# Altium PCB PLL_PCB.PcbDoc (part 2 of 3)
Units mil, origin at the board's own origin, x right, y up, seen from the top; angles counter-clockwise.
Board outline 5844 x 4441 mil, 4 copper layers (Top Layer, GND Layer, Power Layer, Bottom Layer), stack 22.156 mil thick; 143 components, 61 nets, 427 pads, 2616 vias.
Unrouted connection lines stored in the file: 5.
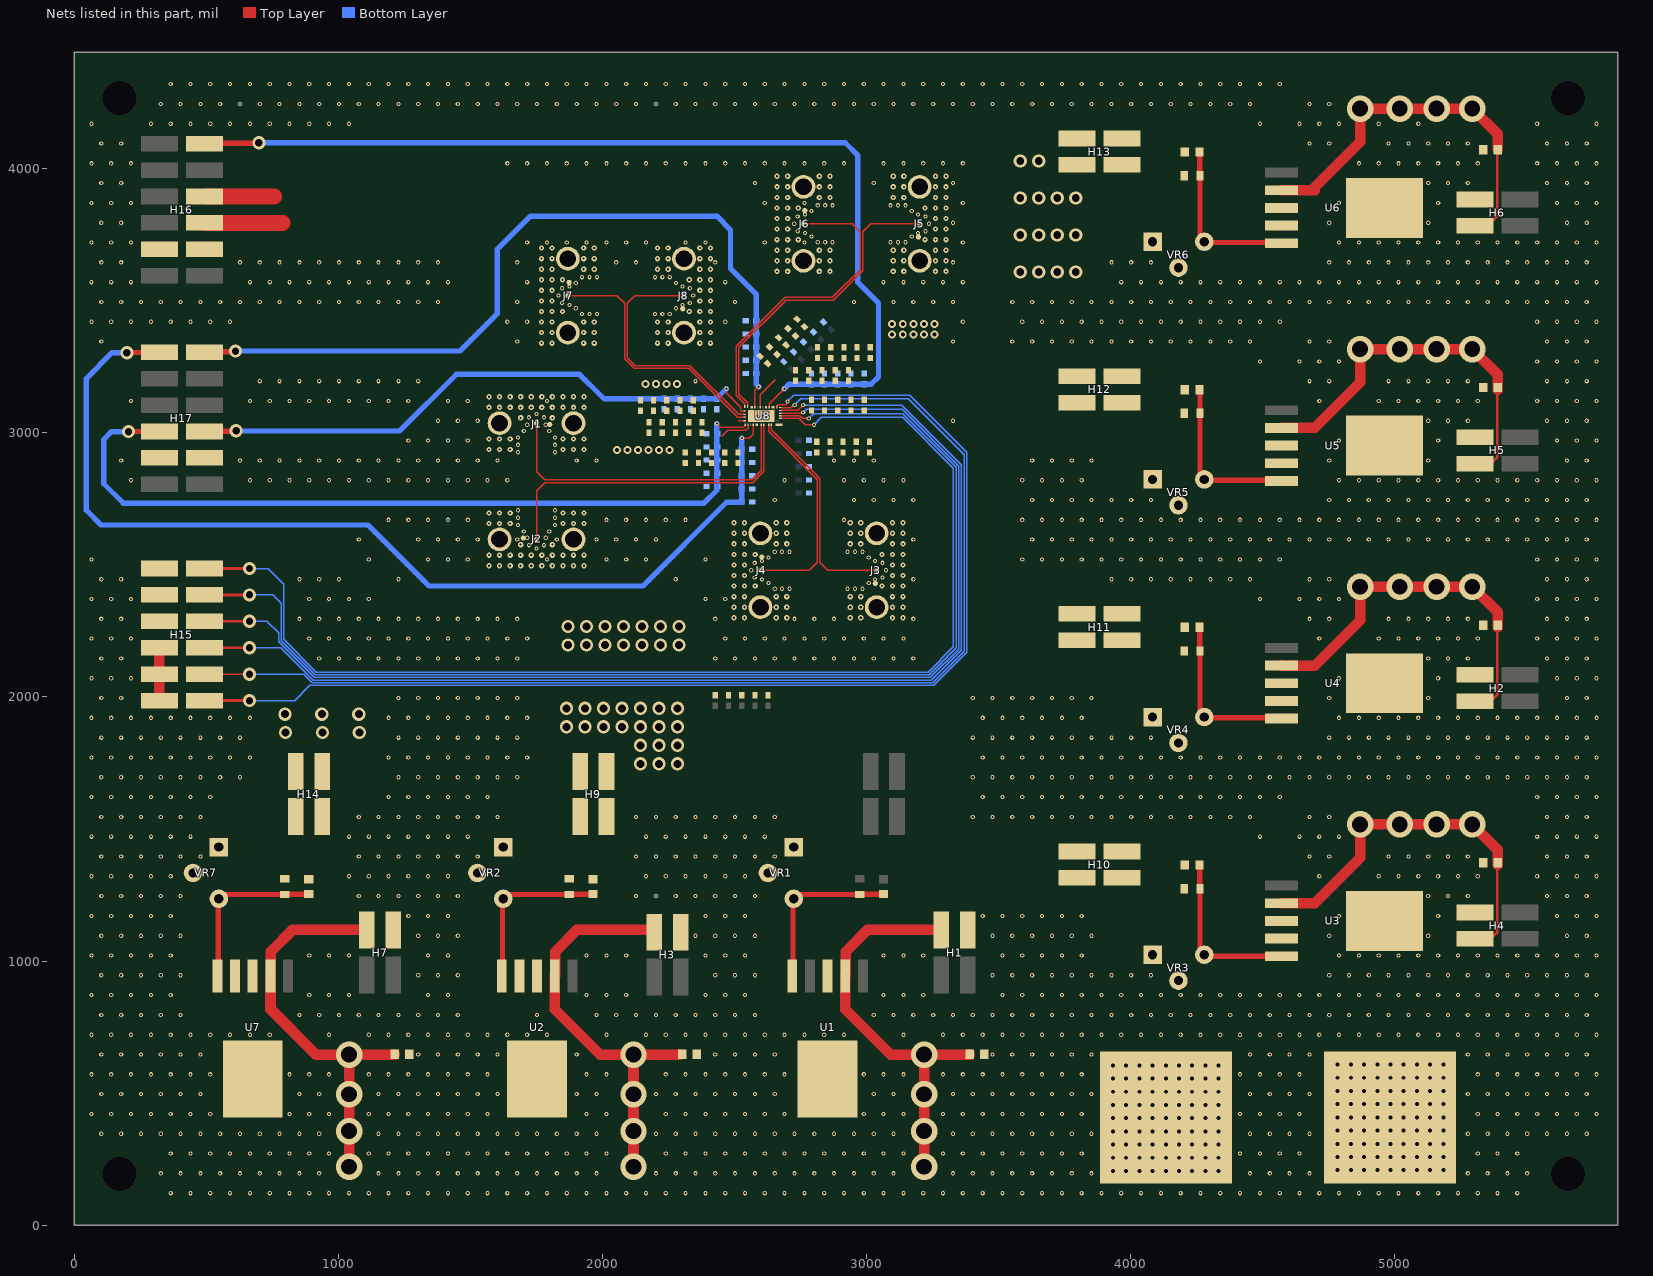
[diagram p4: the nets of this part, all layers, seen from the top]

## Via types
v1: diameter 16, hole 8, Top Layer to Bottom Layer, tented both sides, 2037 vias
v2: diameter 20, hole 8, Top Layer to Bottom Layer, tented both sides, 272 vias
v3: diameter 30, hole 15, Top Layer to Bottom Layer, tented both sides, 182 vias
v4: diameter 50, hole 30, Top Layer to Bottom Layer, tented both sides, 84 vias
v5: diameter 100, hole 60, Top Layer to Bottom Layer, tented both sides, 28 vias
v6: diameter 50, hole 28, Top Layer to Bottom Layer, tented both sides, 13 vias

## Nets (pads, with @x,y where several pads share a name; then routed paths per layer and width w, separated by ;. In a path a pad name is that pad's centre, name@x,y a point inside that pad or via, vN(x,y) a via of type N, cw(c..) or ccw(c..) an arc to the next point about the centre after c; other vN are vias at no path point) (continued)
GND: C1.1 C2.1 C3.1 C4.1 C5.1 C6.1 C7.1 C15.1 C16.1 C17.1 C18.1 C19.1 C20.1 C21.1 C22.1 C23.1 C24.1 C25.1 C26.1 C27.1 C28.1 C29.1 C30.1 C31.1 C32.1 C33.1 C34.1 C35.1 C36.1 C37.1 C38.1 C39.1 C40.1 C41.1 C42.1 C43.1 C44.1 C45.1 C46.1 C47.1 C48.1 C49.1 C50.1 C51.1 C52.1 C53.1 C54.1 C55.1 C56.1 C57.1 C58.1 C59.1 C60.1 C61.1 C62.1 C63.1 C64.1 C65.1 C66.1 C67.1 C68.1 C69.1 C70.1 C71.1 C72.1 C73.1 C74.1 C75.1 C76.1 C77.1 C78.1 C79.1 C80.1 C81.1 C82.1 C83.1 C84.1 C85.1 C86.1 C87.1 C88.1 C89.1 C90.1 C91.1 C92.1 C93.1 C94.1 H1.1 H2.1 H3.1 H4.1 H5.1 H6.1 H7.1 H15.1 H15.2 H15.3 H16.5 H16.11 H17.5 H17.11 J1.1 J1.2 J1.4 J2.1 J2.2 J2.4 J3.1 J3.2 J3.4 J4.1 J4.2 J4.4 J5.1 J5.2 J5.4 J6.1 J6.2 J6.4 J7.1 J7.2 J7.4 J8.1 J8.2 J8.4 P2.1 U1.3 U1.6 U2.3 U2.6 U3.3 U3.6 U4.3 U4.6 U5.3 U5.6 U6.3 U6.6 U7.3 U7.6 U8.1 VR1.2 VR2.2 VR3.2 VR4.2 VR5.2 VR6.2 VR7.2 | length 27.4
  Top Layer w20: U8.1@2584.51,3072 2592.47,3064.04 U8.1@2598.18,3064.04 ; U8.1@2601.01,3064.04 2606.36,3069.38 U8.1@2606.36,3072.21
  other v1: 364.5,121 439.5,121 514.5,121 589.5,121 664.5,121 739.5,121 814.5,121 889.5,121 964.5,121 1039.5,121 1114.5,121 1189.5,121 1264.5,121 1339.5,121 1414.5,121 1489.5,121 1564.5,121 1639.5,121 1714.5,121 1789.5,121 1864.5,121 1939.5,121 2014.5,121 2089.5,121 2164.5,121 2239.5,121 2314.5,121 2389.5,121 2464.5,121 2539.5,121 2614.5,121 2689.5,121 2764.5,121 2839.5,121 2914.5,121 2989.5,121 3064.5,121 3139.5,121 3214.5,121 3289.5,121 3364.5,121 3439.5,121 3514.5,121 3589.5,121 3664.5,121 3739.5,121 3814.5,121 3889.5,121 3964.5,121 4039.5,121 4114.5,121 4189.5,121 4264.5,121 4339.5,121 4414.5,121 4489.5,121 4564.5,121 4639.5,121 4714.5,121 4789.5,121 4864.5,121 4939.5,121 5014.5,121 5089.5,121 5164.5,121 5239.5,121 5314.5,121 5389.5,121 5464.5,121 327,196 402,196 477,196 552,196 627,196 702,196 777,196 852,196 927,196 1152,196 1227,196 1302,196 1377,196 1452,196 1527,196 1602,196 1677,196 1752,196 1827,196 1902,196 1977,196 2202,196 2277,196 2352,196 2427,196 2502,196 2577,196 2652,196 2727,196 2802,196 2877,196 2952,196 3027,196 3102,196 3327,196 3402,196 3477,196 3552,196 3627,196 3702,196 3777,196 3852,196 4452,196 4527,196 4602,196 4677,196 5277,196 5352,196 5427,196 5502,196 364.5,271 439.5,271 514.5,271 589.5,271 664.5,271 739.5,271 814.5,271 889.5,271 964.5,271 1114.5,271 1189.5,271 1264.5,271 1339.5,271 1414.5,271 1489.5,271 1564.5,271 1639.5,271 1714.5,271 1789.5,271 1864.5,271 1939.5,271 2014.5,271 2239.5,271 2314.5,271 2389.5,271 2464.5,271 2539.5,271 2614.5,271 2689.5,271 2764.5,271 2839.5,271 2914.5,271 2989.5,271 3064.5,271 3139.5,271 3289.5,271 3364.5,271 3439.5,271 3514.5,271 3589.5,271 3664.5,271 3739.5,271 3814.5,271 4414.5,271 4489.5,271 4564.5,271 4639.5,271 5314.5,271 5389.5,271 5464.5,271 102,346 177,346 252,346 327,346 402,346 477,346 552,346 627,346 702,346 777,346 852,346 927,346 1152,346 1227,346 1302,346 1377,346 1452,346 1527,346 1602,346 1677,346 1752,346 1827,346 1902,346 1977,346 2202,346 2277,346 2352,346 2427,346 2502,346 2577,346 2652,346 2727,346 2802,346 2877,346 2952,346 3027,346 3102,346 3327,346 3402,346 3477,346 3552,346 3627,346 3702,346 3777,346 3852,346 4452,346 4527,346 4602,346 4677,346 5277,346 5352,346 5427,346 5502,346 5577,346 5652,346 5727,346 64.5,421 139.5,421 214.5,421 289.5,421 364.5,421 439.5,421 514.5,421 814.5,421 889.5,421 964.5,421 1114.5,421 1189.5,421 1264.5,421 1339.5,421 1414.5,421 1489.5,421 1564.5,421 1939.5,421 2014.5,421 2239.5,421 2314.5,421 2389.5,421 2464.5,421 2539.5,421 2614.5,421 2689.5,421 2989.5,421 3064.5,421 3139.5,421 3289.5,421 3364.5,421 3439.5,421 3514.5,421 3589.5,421 3664.5,421 3739.5,421 3814.5,421 4414.5,421 4489.5,421 4564.5,421 4639.5,421 5314.5,421 5389.5,421 5464.5,421 5539.5,421 5614.5,421 5689.5,421 5764.5,421 102,496 177,496 252,496 327,496 402,496 477,496 852,496 927,496 1152,496 1227,496 1302,496 1377,496 1452,496 1527,496 1602,496 1902,496 1977,496 2202,496 2277,496 2352,496 2427,496 2502,496 2577,496 2652,496 3027,496 3102,496 3327,496 3402,496 3477,496 3552,496 3627,496 3702,496 3777,496 3852,496 4452,496 4527,496 4602,496 4677,496 5277,496 5352,496 5427,496 5502,496 5577,496 5652,496 5727,496 64.5,571 139.5,571 214.5,571 289.5,571 364.5,571 439.5,571 514.5,571 814.5,571 889.5,571 964.5,571 1114.5,571 1189.5,571 1264.5,571 1339.5,571 1414.5,571 1489.5,571 1564.5,571 1939.5,571 2014.5,571 2239.5,571 2314.5,571 2389.5,571 2464.5,571 2539.5,571 2614.5,571 2689.5,571 2989.5,571 3064.5,571 3139.5,571 3289.5,571 3364.5,571 3439.5,571 3514.5,571 3589.5,571 3664.5,571 3739.5,571 3814.5,571 4414.5,571 4489.5,571 4564.5,571 4639.5,571 5314.5,571 5389.5,571 5464.5,571 5539.5,571 5614.5,571 5689.5,571 5764.5,571 102,646 177,646 252,646 327,646 402,646 477,646 1302,646 1377,646 1452,646 1527,646 1602,646 1902,646 2427,646 2502,646 2577,646 2652,646 3477,646 3552,646 3627,646 3702,646 3777,646 3852,646 4452,646 4527,646 4602,646 4677,646 5277,646 5352,646 5427,646 5502,646 5577,646 5652,646 5727,646 64.5,721 139.5,721 214.5,721 289.5,721 364.5,721 439.5,721 514.5,721 589.5,721 664.5,721 739.5,721 964.5,721 1114.5,721 1189.5,721 1264.5,721 1339.5,721 1414.5,721 1489.5,721 1564.5,721 1639.5,721 1714.5,721 1789.5,721 2014.5,721 2164.5,721 2239.5,721 2314.5,721 2389.5,721 2464.5,721 2539.5,721 2614.5,721 2689.5,721 2764.5,721 2839.5,721 2914.5,721 3139.5,721 3289.5,721 3364.5,721 3439.5,721 3514.5,721 3589.5,721 3664.5,721 3739.5,721 3814.5,721 3889.5,721 3964.5,721 4039.5,721 4114.5,721 4189.5,721 4264.5,721 4339.5,721 4414.5,721 4489.5,721 4564.5,721 4639.5,721 4714.5,721 4789.5,721 4864.5,721 4939.5,721 5014.5,721 5089.5,721 5164.5,721 5239.5,721 5314.5,721 5389.5,721 5464.5,721 5539.5,721 5614.5,721 5689.5,721 5764.5,721 102,796 177,796 252,796 327,796 402,796 852,796 927,796 1002,796 1077,796 1152,796 1227,796 1302,796 1377,796 1452,796 1752,796 1977,796 2052,796 2127,796 2202,796 2277,796 2352,796 2427,796 2502,796 2577,796 3027,796 3102,796 3177,796 3252,796 3327,796 3402,796 3477,796 3552,796 3627,796 3702,796 3777,796 3852,796 3927,796 4002,796 4077,796 4152,796 4227,796 4302,796 4377,796 4452,796 4527,796 4602,796 4677,796 4752,796 4827,796 4902,796 4977,796 5052,796 5127,796 5202,796 5277,796 5352,796 5427,796 5502,796 5577,796 5652,796 5727,796 64.5,871 139.5,871 214.5,871 289.5,871 364.5,871 889.5,871 964.5,871 1039.5,871 1339.5,871 1414.5,871 1939.5,871 2014.5,871 2089.5,871 2389.5,871 2464.5,871 2539.5,871 3064.5,871 3139.5,871 3214.5,871 3514.5,871 3589.5,871 3664.5,871 3739.5,871 3814.5,871 3889.5,871 3964.5,871 4039.5,871 4114.5,871 4189.5,871 4264.5,871 4339.5,871 4414.5,871 4489.5,871 4564.5,871 4639.5,871 4714.5,871 4789.5,871 4864.5,871 4939.5,871 5014.5,871 5089.5,871 5164.5,871 5239.5,871 5314.5,871 5389.5,871 5464.5,871 5539.5,871 5614.5,871 5689.5,871 5764.5,871 102,946 177,946 252,946 327,946 402,946 1302,946 1377,946 1452,946 2427,946 2502,946 2577,946 3477,946 3552,946 3627,946 3702,946 3777,946 3852,946 3927,946 4002,946 4077,946 4752,946 4827,946 4902,946 4977,946 5052,946 5127,946 5202,946 5277,946 5352,946 5427,946 5502,946 5577,946 5652,946 5727,946 64.5,1021 139.5,1021 214.5,1021 289.5,1021 364.5,1021 889.5,1021 964.5,1021 1039.5,1021 1339.5,1021 1414.5,1021 1939.5,1021 2014.5,1021 2089.5,1021 2389.5,1021 2464.5,1021 2539.5,1021 3064.5,1021 3139.5,1021 3214.5,1021 3514.5,1021 3589.5,1021 3664.5,1021 3739.5,1021 3814.5,1021 4789.5,1021 4864.5,1021 4939.5,1021 5014.5,1021 5089.5,1021 5164.5,1021 5239.5,1021 5314.5,1021 5389.5,1021 5464.5,1021 5539.5,1021 5614.5,1021 5689.5,1021 5764.5,1021 102,1096 177,1096 252,1096 327,1096 402,1096 1302,1096 1377,1096 1452,1096 2352,1096 2427,1096 2502,1096 2577,1096 3477,1096 3552,1096 3627,1096 3702,1096 3777,1096 3852,1096 4752,1096 5127,1096 5652,1096 5727,1096 64.5,1171 139.5,1171 214.5,1171 289.5,1171 364.5,1171 1264.5,1171 1339.5,1171 1414.5,1171 2389.5,1171 2464.5,1171 2539.5,1171 3439.5,1171 3514.5,1171 3589.5,1171 3664.5,1171 3739.5,1171 3814.5,1171 4789.5,1171 5164.5,1171 5614.5,1171 5689.5,1171 5764.5,1171 102,1246 177,1246 252,1246 327,1246 402,1246 1077,1246 1152,1246 1227,1246 1302,1246 1377,1246 1452,1246 2127,1246 2202,1246 2277,1246 2352,1246 2427,1246 2502,1246 2577,1246 5127,1246 5202,1246 5277,1246 5577,1246 5652,1246 5727,1246 64.5,1321 139.5,1321 214.5,1321 289.5,1321 364.5,1321 1039.5,1321 1114.5,1321 1189.5,1321 1264.5,1321 1339.5,1321 1414.5,1321 2164.5,1321 2239.5,1321 2314.5,1321 2389.5,1321 2464.5,1321 2539.5,1321 4714.5,1321 4939.5,1321 5014.5,1321 5089.5,1321 5164.5,1321 5239.5,1321 5314.5,1321 5539.5,1321 5614.5,1321 5689.5,1321 5764.5,1321 102,1396 177,1396 252,1396 327,1396 402,1396 477,1396 1077,1396 1152,1396 1227,1396 1302,1396 1377,1396 1452,1396 1527,1396 2127,1396 2202,1396 2277,1396 2352,1396 2427,1396 2502,1396 2577,1396 2652,1396 4677,1396 4752,1396 4977,1396 5052,1396 5127,1396 5202,1396 5277,1396 5577,1396 5652,1396 5727,1396 64.5,1471 139.5,1471 214.5,1471 289.5,1471 364.5,1471 439.5,1471 1039.5,1471 1114.5,1471 1189.5,1471 1264.5,1471 1339.5,1471 1414.5,1471 1489.5,1471 2164.5,1471 2239.5,1471 2314.5,1471 2389.5,1471 2464.5,1471 2539.5,1471 2614.5,1471 4489.5,1471 4639.5,1471 4714.5,1471 4789.5,1471 5539.5,1471 5614.5,1471 5689.5,1471 5764.5,1471 102,1546 177,1546 252,1546 327,1546 402,1546 477,1546 1077,1546 1152,1546 1227,1546 1302,1546 1377,1546 1452,1546 1527,1546 1602,1546 2127,1546 2202,1546 2277,1546 2352,1546 2427,1546 2502,1546 2577,1546 2652,1546 3402,1546 3477,1546 3552,1546 3627,1546 3702,1546 3777,1546 3852,1546 3927,1546 4002,1546 4077,1546 4152,1546 4227,1546 4302,1546 4377,1546 4452,1546 4677,1546 4752,1546 5577,1546 5652,1546 5727,1546 64.5,1621 139.5,1621 214.5,1621 289.5,1621 364.5,1621 439.5,1621 514.5,1621 1189.5,1621 1264.5,1621 1339.5,1621 1414.5,1621 1489.5,1621 1564.5,1621 3439.5,1621 3514.5,1621 3589.5,1621 3664.5,1621 3739.5,1621 3814.5,1621 3889.5,1621 3964.5,1621 4039.5,1621 4114.5,1621 4189.5,1621 4264.5,1621 4339.5,1621 4414.5,1621 4489.5,1621 4564.5,1621 5539.5,1621 5614.5,1621 5689.5,1621 5764.5,1621 102,1696 177,1696 252,1696 327,1696 402,1696 477,1696 552,1696 627,1696 1227,1696 1302,1696 1377,1696 1452,1696 1527,1696 1602,1696 1677,1696 3402,1696 3477,1696 3552,1696 3627,1696 3702,1696 3777,1696 3852,1696 3927,1696 4002,1696 4077,1696 4152,1696 4227,1696 4302,1696 4377,1696 4452,1696 4527,1696 4602,1696 4677,1696 4752,1696 4827,1696 4902,1696 4977,1696 5052,1696 5127,1696 5202,1696 5277,1696 5352,1696 5427,1696 5502,1696 5577,1696 5652,1696 5727,1696 64.5,1771 139.5,1771 214.5,1771 289.5,1771 364.5,1771 439.5,1771 514.5,1771 589.5,1771 664.5,1771 1189.5,1771 1264.5,1771 1339.5,1771 1414.5,1771 1489.5,1771 1564.5,1771 1639.5,1771 1714.5,1771 3439.5,1771 3514.5,1771 3589.5,1771 3664.5,1771 3739.5,1771 3814.5,1771 3889.5,1771 3964.5,1771 4039.5,1771 4114.5,1771 4189.5,1771 4264.5,1771 4339.5,1771 4414.5,1771 4489.5,1771 4564.5,1771 4639.5,1771 4714.5,1771 4789.5,1771 4864.5,1771 4939.5,1771 5014.5,1771 5089.5,1771 5164.5,1771 5239.5,1771 5314.5,1771 5389.5,1771 5464.5,1771 5539.5,1771 5614.5,1771 5689.5,1771 5764.5,1771 102,1846 177,1846 252,1846 327,1846 402,1846 477,1846 552,1846 627,1846 1227,1846 1302,1846 1377,1846 1452,1846 1527,1846 1602,1846 1677,1846 3402,1846 3477,1846 3552,1846 3627,1846 3702,1846 3777,1846 3852,1846 3927,1846 4002,1846 4077,1846 4752,1846 4827,1846 4902,1846 4977,1846 5052,1846 5127,1846 5202,1846 5277,1846 5352,1846 5427,1846 5502,1846 5577,1846 5652,1846 5727,1846 64.5,1921 139.5,1921 214.5,1921 289.5,1921 364.5,1921 439.5,1921 514.5,1921 589.5,1921 664.5,1921 1189.5,1921 1264.5,1921 1339.5,1921 1414.5,1921 1489.5,1921 1564.5,1921 1639.5,1921 1714.5,1921 3439.5,1921 3514.5,1921 3589.5,1921 3664.5,1921 3739.5,1921 3814.5,1921 4789.5,1921 4864.5,1921 4939.5,1921 5014.5,1921 5089.5,1921 5164.5,1921 5239.5,1921 5314.5,1921 5389.5,1921 5464.5,1921 5539.5,1921 5614.5,1921 5689.5,1921 5764.5,1921 102,1996 177,1996 1227,1996 1302,1996 1377,1996 1452,1996 1527,1996 1602,1996 1677,1996 3402,1996 3477,1996 3552,1996 3627,1996 3702,1996 3777,1996 3852,1996 4752,1996 5127,1996 5652,1996 5727,1996 64.5,2071 139.5,2071 214.5,2071 4789.5,2071 5164.5,2071 5614.5,2071 5689.5,2071 5764.5,2071 102,2146 177,2146 927,2146 1002,2146 1077,2146 1152,2146 1227,2146 1302,2146 1377,2146 1452,2146 1527,2146 1602,2146 1677,2146 2427,2146 2502,2146 2577,2146 2652,2146 2727,2146 2802,2146 2877,2146 2952,2146 3027,2146 3102,2146 3177,2146 5127,2146 5202,2146 5277,2146 5577,2146 5652,2146 5727,2146 64.5,2221 139.5,2221 214.5,2221 889.5,2221 964.5,2221 1039.5,2221 1114.5,2221 1189.5,2221 1264.5,2221 1339.5,2221 1414.5,2221 1489.5,2221 1564.5,2221 1639.5,2221 1714.5,2221 2464.5,2221 2539.5,2221 2614.5,2221 2689.5,2221 2764.5,2221 2839.5,2221 2914.5,2221 2989.5,2221 3064.5,2221 3139.5,2221 4714.5,2221 4939.5,2221 5014.5,2221 5089.5,2221 5164.5,2221 5239.5,2221 5314.5,2221 5539.5,2221 5614.5,2221 5689.5,2221 5764.5,2221 102,2296 177,2296 852,2296 927,2296 1002,2296 1077,2296 1152,2296 1227,2296 1302,2296 1377,2296 1452,2296 1527,2296 1602,2296 1677,2296 2427,2296 2727,2296 2802,2296 2877,2296 3177,2296 4677,2296 4752,2296 4977,2296 5052,2296 5127,2296 5202,2296 5277,2296 5577,2296 5652,2296 5727,2296 64.5,2371 139.5,2371 214.5,2371 889.5,2371 964.5,2371 1039.5,2371 1114.5,2371 2389.5,2371 2464.5,2371 4489.5,2371 4639.5,2371 4714.5,2371 4789.5,2371 5539.5,2371 5614.5,2371 5689.5,2371 5764.5,2371 2652.01,2410 2680.01,2410 2708.01,2410 2928.01,2410 2956.01,2410 2984.01,2410 2628.01,2432 3008.01,2432 2604.01,2445 3032.01,2445 102,2446 177,2446 852,2446 927,2446 1002,2446 1227,2446 2277,2446 3177,2446 3927,2446 4002,2446 4077,2446 4152,2446 4227,2446 4302,2446 4377,2446 4452,2446 4677,2446 4752,2446 5577,2446 5652,2446 5727,2446 2576.01,2452 3060.01,2452 2563.01,2480 3073.01,2480 2576.01,2508 3060.01,2508 2604.01,2515 3032.01,2515 64.5,2521 1114.5,2521 1339.5,2521 1414.5,2521 1489.5,2521 1789.5,2521 2014.5,2521 2089.5,2521 2164.5,2521 2389.5,2521 3589.5,2521 3664.5,2521 3739.5,2521 3814.5,2521 3889.5,2521 3964.5,2521 4039.5,2521 4114.5,2521 4189.5,2521 4264.5,2521 4339.5,2521 4414.5,2521 4489.5,2521 4564.5,2521 5539.5,2521 5614.5,2521 5689.5,2521 5764.5,2521 2628.01,2528 3008.01,2528 2652.01,2550 2680.01,2550 2708.01,2550 2928.01,2550 2956.01,2550 2984.01,2550 1750,2562 1722,2575 1778,2575 1077,2596 1302,2596 1377,2596 1452,2596 1527,2596 1677,2596 1827,2596 1977,2596 2052,2596 2127,2596 2202,2596 3177,2596 3627,2596 3702,2596 3777,2596 3852,2596 3927,2596 4002,2596 4077,2596 4152,2596 4227,2596 4302,2596 4377,2596 4452,2596 4527,2596 4602,2596 4677,2596 4752,2596 4827,2596 4902,2596 4977,2596 5052,2596 5127,2596 5202,2596 5277,2596 5352,2596 5427,2596 5502,2596 5577,2596 5652,2596 5727,2596 1715,2603 1785,2603 1702,2627 1798,2627 1680,2651 1820,2651 1189.5,2671 1264.5,2671 1339.5,2671 1414.5,2671 1489.5,2671 2014.5,2671 2089.5,2671 2164.5,2671 2239.5,2671 2314.5,2671 2914.5,2671 3589.5,2671 3664.5,2671 3739.5,2671 3814.5,2671 3889.5,2671 3964.5,2671 4039.5,2671 4114.5,2671 4189.5,2671 4264.5,2671 4339.5,2671 4414.5,2671 4489.5,2671 4564.5,2671 4639.5,2671 4714.5,2671 4789.5,2671 4864.5,2671 4939.5,2671 5014.5,2671 5089.5,2671 5164.5,2671 5239.5,2671 5314.5,2671 5389.5,2671 5464.5,2671 5539.5,2671 5614.5,2671 5689.5,2671 5764.5,2671 1680,2679 1820,2679 1680,2707 1820,2707 2652,2746 2952,2746 3027,2746 3102,2746 3177,2746 3627,2746 3702,2746 3777,2746 3852,2746 3927,2746 4002,2746 4077,2746 4752,2746 4827,2746 4902,2746 4977,2746 5052,2746 5127,2746 5202,2746 5277,2746 5352,2746 5427,2746 5502,2746 5577,2746 5652,2746 5727,2746 214.5,2821 664.5,2821 739.5,2821 814.5,2821 889.5,2821 964.5,2821 1039.5,2821 1114.5,2821 1189.5,2821 1264.5,2821 1339.5,2821 1414.5,2821 1489.5,2821 1564.5,2821 1639.5,2821 2689.5,2821 2914.5,2821 2989.5,2821 3064.5,2821 3139.5,2821 3589.5,2821 3664.5,2821 3739.5,2821 3814.5,2821 4789.5,2821 4864.5,2821 4939.5,2821 5014.5,2821 5089.5,2821 5164.5,2821 5239.5,2821 5314.5,2821 5389.5,2821 5464.5,2821 5539.5,2821 5614.5,2821 5689.5,2821 5764.5,2821 177,2896 627,2896 702,2896 777,2896 852,2896 927,2896 1002,2896 1077,2896 1152,2896 1227,2896 1302,2896 1377,2896 1452,2896 1527,2896 1602,2896 1902,2896 1977,2896 2877,2896 2952,2896 3027,2896 3627,2896 3702,2896 3777,2896 3852,2896 4752,2896 5127,2896 5652,2896 5727,2896 1680,2927 1820,2927 1680,2955 1820,2955 1264.5,2971 1339.5,2971 1414.5,2971 1489.5,2971 4789.5,2971 5164.5,2971 5614.5,2971 5689.5,2971 5764.5,2971 1680,2983 1820,2983 1702,3007 1798,3007 1715,3031 1785,3031 1377,3046 1452,3046 1527,3046 3327,3046 5127,3046 5202,3046 5277,3046 5577,3046 5652,3046 5727,3046 1722,3059 1778,3059 2584,3065 2604,3065 2624,3065 1750,3072 214.5,3121 664.5,3121 739.5,3121 814.5,3121 889.5,3121 964.5,3121 1039.5,3121 1114.5,3121 1189.5,3121 1264.5,3121 1414.5,3121 1489.5,3121 1789.5,3121 4714.5,3121 4939.5,3121 5014.5,3121 5089.5,3121 5164.5,3121 5239.5,3121 5314.5,3121 5539.5,3121 5614.5,3121 5689.5,3121 5764.5,3121 702,3196 777,3196 852,3196 927,3196 1002,3196 1077,3196 1152,3196 1227,3196 1302,3196 2352,3196 4677,3196 4752,3196 4977,3196 5052,3196 5127,3196 5202,3196 5277,3196 5577,3196 5652,3196 5727,3196 4489.5,3271 4639.5,3271 4714.5,3271 4789.5,3271 5539.5,3271 5614.5,3271 5689.5,3271 5764.5,3271 102,3346 1677,3346 3327,3346 3552,3346 3627,3346 3702,3346 3777,3346 3852,3346 3927,3346 4002,3346 4077,3346 4152,3346 4227,3346 4302,3346 4377,3346 4452,3346 4677,3346 4752,3346 5577,3346 5652,3346 5727,3346 64.5,3421 139.5,3421 214.5,3421 289.5,3421 364.5,3421 439.5,3421 514.5,3421 589.5,3421 1639.5,3421 1714.5,3421 2464.5,3421 3364.5,3421 3589.5,3421 3664.5,3421 3739.5,3421 3814.5,3421 3889.5,3421 3964.5,3421 4039.5,3421 4114.5,3421 4189.5,3421 4264.5,3421 4339.5,3421 4414.5,3421 4489.5,3421 4564.5,3421 5539.5,3421 5614.5,3421 5689.5,3421 5764.5,3421 1922.5,3450 1950.5,3450 1978.5,3450 2198.5,3450 2226.5,3450 2254.5,3450 1898.5,3472 2278.5,3472 1874.5,3485 2302.5,3485 1846.5,3492 2330.5,3492 102,3496 177,3496 252,3496 327,3496 402,3496 477,3496 552,3496 627,3496 702,3496 777,3496 852,3496 927,3496 1002,3496 1077,3496 1152,3496 1227,3496 1302,3496 1377,3496 1677,3496 2502,3496 2952,3496 3102,3496 3177,3496 3252,3496 3327,3496 3552,3496 3627,3496 3702,3496 3777,3496 3852,3496 3927,3496 4002,3496 4077,3496 4152,3496 4227,3496 4302,3496 4377,3496 4452,3496 4527,3496 4602,3496 4677,3496 4752,3496 4827,3496 4902,3496 4977,3496 5052,3496 5127,3496 5202,3496 5277,3496 5352,3496 5427,3496 5502,3496 5577,3496 5652,3496 5727,3496 1833.5,3520 2343.5,3520 1846.5,3548 2330.5,3548 1874.5,3555 2302.5,3555 1898.5,3568 2278.5,3568 64.5,3571 139.5,3571 214.5,3571 664.5,3571 739.5,3571 814.5,3571 889.5,3571 964.5,3571 1039.5,3571 1114.5,3571 1189.5,3571 1264.5,3571 1339.5,3571 1414.5,3571 1714.5,3571 2464.5,3571 3064.5,3571 3139.5,3571 3214.5,3571 3289.5,3571 3364.5,3571 3964.5,3571 4039.5,3571 4114.5,3571 4189.5,3571 4264.5,3571 4339.5,3571 4414.5,3571 4489.5,3571 4564.5,3571 4639.5,3571 4714.5,3571 4789.5,3571 4864.5,3571 4939.5,3571 5014.5,3571 5089.5,3571 5164.5,3571 5239.5,3571 5314.5,3571 5389.5,3571 5464.5,3571 5539.5,3571 5614.5,3571 5689.5,3571 5764.5,3571 1922.5,3590 1950.5,3590 1978.5,3590 2198.5,3590 2226.5,3590 2254.5,3590 102,3646 177,3646 627,3646 702,3646 777,3646 852,3646 927,3646 1002,3646 1077,3646 1152,3646 1227,3646 1302,3646 1377,3646 1677,3646 2052,3646 2127,3646 2427,3646 3327,3646 3927,3646 4002,3646 4077,3646 4752,3646 4827,3646 4902,3646 4977,3646 5052,3646 5127,3646 5202,3646 5277,3646 5352,3646 5427,3646 5502,3646 5577,3646 5652,3646 5727,3646 64.5,3721 139.5,3721 214.5,3721 1714.5,3721 1789.5,3721 1864.5,3721 1939.5,3721 2014.5,3721 2089.5,3721 2164.5,3721 2314.5,3721 2389.5,3721 2614.5,3721 2764.5,3721 3364.5,3721 4789.5,3721 4864.5,3721 4939.5,3721 5014.5,3721 5089.5,3721 5164.5,3721 5239.5,3721 5314.5,3721 5389.5,3721 5464.5,3721 5539.5,3721 5614.5,3721 5689.5,3721 5764.5,3721 2815,3722 2843,3722 2871,3722 3091,3722 3119,3722 3147,3722 2791,3744 3171,3744 2767,3757 3195,3757 2739,3764 3223,3764 2726,3792 3236,3792 102,3796 177,3796 3327,3796 4752,3796 5127,3796 5652,3796 5727,3796 2739,3820 3223,3820 2767,3827 3195,3827 2791,3840 3171,3840 2815,3862 2843,3862 2871,3862 3091,3862 3119,3862 3147,3862 64.5,3871 139.5,3871 214.5,3871 2614.5,3871 2764.5,3871 3364.5,3871 4789.5,3871 5164.5,3871 5614.5,3871 5689.5,3871 5764.5,3871 102,3946 177,3946 2577,3946 3027,3946 3327,3946 5127,3946 5202,3946 5277,3946 5577,3946 5652,3946 5727,3946 64.5,4021 139.5,4021 214.5,4021 1639.5,4021 1714.5,4021 1789.5,4021 1864.5,4021 1939.5,4021 2014.5,4021 2089.5,4021 2164.5,4021 2239.5,4021 2314.5,4021 2389.5,4021 2464.5,4021 2539.5,4021 2614.5,4021 2689.5,4021 2764.5,4021 2839.5,4021 2914.5,4021 3064.5,4021 3139.5,4021 3214.5,4021 3289.5,4021 3364.5,4021 4864.5,4021 4939.5,4021 5014.5,4021 5089.5,4021 5164.5,4021 5239.5,4021 5314.5,4021 5539.5,4021 5614.5,4021 5689.5,4021 5764.5,4021 102,4096 177,4096 4677,4096 4752,4096 4977,4096 5052,4096 5127,4096 5202,4096 5277,4096 5577,4096 5652,4096 5727,4096 64.5,4171 289.5,4171 364.5,4171 439.5,4171 514.5,4171 589.5,4171 664.5,4171 739.5,4171 814.5,4171 889.5,4171 964.5,4171 1039.5,4171 4489.5,4171 4639.5,4171 4714.5,4171 4789.5,4171 4939.5,4171 5089.5,4171 5539.5,4171 5764.5,4171 327,4246 402,4246 477,4246 552,4246 627,4246 702,4246 777,4246 852,4246 927,4246 1002,4246 1077,4246 1152,4246 1227,4246 1302,4246 1377,4246 1452,4246 1527,4246 1602,4246 1677,4246 1752,4246 1827,4246 1902,4246 1977,4246 2052,4246 2127,4246 2202,4246 2277,4246 2352,4246 2427,4246 2502,4246 2577,4246 2652,4246 2727,4246 2802,4246 2877,4246 2952,4246 3027,4246 3102,4246 3177,4246 3252,4246 3327,4246 3402,4246 3477,4246 3552,4246 3627,4246 3702,4246 3777,4246 3852,4246 3927,4246 4002,4246 4077,4246 4152,4246 4227,4246 4302,4246 4377,4246 4452,4246 4677,4246 4752,4246 364.5,4321 439.5,4321 514.5,4321 589.5,4321 664.5,4321 739.5,4321 814.5,4321 889.5,4321 964.5,4321 1039.5,4321 1114.5,4321 1189.5,4321 1264.5,4321 1339.5,4321 1414.5,4321 1489.5,4321 1564.5,4321 1639.5,4321 1714.5,4321 1789.5,4321 1864.5,4321 1939.5,4321 2014.5,4321 2089.5,4321 2164.5,4321 2239.5,4321 2314.5,4321 2389.5,4321 2464.5,4321 2539.5,4321 2614.5,4321 2689.5,4321 2764.5,4321 2839.5,4321 2914.5,4321 2989.5,4321 3064.5,4321 3139.5,4321 3214.5,4321 3289.5,4321 3364.5,4321 3439.5,4321 3514.5,4321 3589.5,4321 3664.5,4321 3739.5,4321 3814.5,4321 3889.5,4321 3964.5,4321 4039.5,4321 4114.5,4321 4189.5,4321 4264.5,4321 4339.5,4321 4414.5,4321 4489.5,4321 4564.5,4321
  other v2: 2498.01,2300 2538.01,2300 2658.01,2300 2698.01,2300 2938.01,2300 2978.01,2300 3098.01,2300 3138.01,2300 2498.01,2340 2538.01,2340 2658.01,2340 2698.01,2340 2938.01,2340 2978.01,2340 3098.01,2340 3138.01,2340 2498.01,2380 2538.01,2380 2658.01,2380 2698.01,2380 2938.01,2380 2978.01,2380 3098.01,2380 3138.01,2380 2498.01,2420 2538.01,2420 2578.01,2420 3058.01,2420 3098.01,2420 3138.01,2420 2498.01,2460 2538.01,2460 3098.01,2460 3138.01,2460 1570,2497 1610,2497 1650,2497 1690,2497 1730,2497 1770,2497 1810,2497 1850,2497 1890,2497 1930,2497 2498.01,2500 2538.01,2500 3098.01,2500 3138.01,2500 1570,2537 1610,2537 1650,2537 1690,2537 1730,2537 1770,2537 1810,2537 1850,2537 1890,2537 1930,2537 2498.01,2540 2538.01,2540 2578.01,2540 3058.01,2540 3098.01,2540 3138.01,2540 1690,2577 1810,2577 2498.01,2580 2538.01,2580 2658.01,2580 2698.01,2580 2938.01,2580 2978.01,2580 3098.01,2580 3138.01,2580 2498.01,2620 2538.01,2620 2658.01,2620 2698.01,2620 2938.01,2620 2978.01,2620 3098.01,2620 3138.01,2620 1570,2657 1610,2657 1650,2657 1850,2657 1890,2657 1930,2657 2498.01,2660 2538.01,2660 2658.01,2660 2698.01,2660 2938.01,2660 2978.01,2660 3098.01,2660 3138.01,2660 1570,2697 1610,2697 1650,2697 1850,2697 1890,2697 1930,2697 1570,2937 1610,2937 1650,2937 1850,2937 1890,2937 1930,2937 1570,2977 1610,2977 1650,2977 1850,2977 1890,2977 1930,2977 1690,3057 1810,3057 1570,3097 1610,3097 1650,3097 1690,3097 1730,3097 1770,3097 1810,3097 1850,3097 1890,3097 1930,3097 1570,3137 1610,3137 1650,3137 1690,3137 1730,3137 1770,3137 1810,3137 1850,3137 1890,3137 1930,3137 1768.5,3340 1808.5,3340 1928.5,3340 1968.5,3340 2208.5,3340 2248.5,3340 2368.5,3340 2408.5,3340 1768.5,3380 1808.5,3380 1928.5,3380 1968.5,3380 2208.5,3380 2248.5,3380 2368.5,3380 2408.5,3380 1768.5,3420 1808.5,3420 1928.5,3420 1968.5,3420 2208.5,3420 2248.5,3420 2368.5,3420 2408.5,3420 1768.5,3460 1808.5,3460 1848.5,3460 2328.5,3460 2368.5,3460 2408.5,3460 1768.5,3500 1808.5,3500 2368.5,3500 2408.5,3500 1768.5,3540 1808.5,3540 2368.5,3540 2408.5,3540 1768.5,3580 1808.5,3580 1848.5,3580 2328.5,3580 2368.5,3580 2408.5,3580 2661,3612 2701,3612 2821,3612 2861,3612 3101,3612 3141,3612 3261,3612 3301,3612 1768.5,3620 1808.5,3620 1928.5,3620 1968.5,3620 2208.5,3620 2248.5,3620 2368.5,3620 2408.5,3620 2661,3652 2701,3652 2821,3652 2861,3652 3101,3652 3141,3652 3261,3652 3301,3652 1768.5,3660 1808.5,3660 1928.5,3660 1968.5,3660 2208.5,3660 2248.5,3660 2368.5,3660 2408.5,3660 2661,3692 2701,3692 2821,3692 2861,3692 3101,3692 3141,3692 3261,3692 3301,3692 1768.5,3700 1808.5,3700 1928.5,3700 1968.5,3700 2208.5,3700 2248.5,3700 2368.5,3700 2408.5,3700 2661,3732 2701,3732 2741,3732 3221,3732 3261,3732 3301,3732 2661,3772 2701,3772 3261,3772 3301,3772 2661,3812 2701,3812 3261,3812 3301,3812 2661,3852 2701,3852 2741,3852 3221,3852 3261,3852 3301,3852 2661,3892 2701,3892 2821,3892 2861,3892 3101,3892 3141,3892 3261,3892 3301,3892 2661,3932 2701,3932 2821,3932 2861,3932 3101,3932 3141,3932 3261,3932 3301,3932 2661,3972 2701,3972 2821,3972 2861,3972 3101,3972 3141,3972 3261,3972 3301,3972
  other v3: 3933,205 3983,205 4033,205 4083,205 4133,205 4183,205 4233,205 4283,205 4333,205 3933,255 3983,255 4033,255 4083,255 4133,255 4183,255 4233,255 4283,255 4333,255 3933,305 3983,305 4033,305 4083,305 4133,305 4183,305 4233,305 4283,305 4333,305 3933,355 3983,355 4033,355 4083,355 4133,355 4183,355 4233,355 4283,355 4333,355 3933,405 3983,405 4033,405 4083,405 4133,405 4183,405 4233,405 4283,405 4333,405 3933,455 3983,455 4033,455 4083,455 4133,455 4183,455 4233,455 4283,455 4333,455 3933,505 3983,505 4033,505 4083,505 4133,505 4183,505 4233,505 4283,505 4333,505 3933,555 3983,555 4033,555 4083,555 4133,555 4183,555 4233,555 4283,555 4333,555 3933,605 3983,605 4033,605 4083,605 4133,605 4183,605 4233,605 4283,605 4333,605
IREF: C53.2 C62.2 C71.2 C80.2 C89.2 H17.1 U8.25 | length 3879.2
  Top Layer w5: v1(2527.7,2980.31) 2556.01,2980.31 2571.01,2995.31 U8.25@2571.01,3031.04
  Top Layer w20: v6(198.72,3304) 199.49,3304.78 321.22,3304.78 H17.1@322,3305.55
  Bottom Layer w20: v6(198.72,3304) 143,3304 45,3206 45,2707 101,2651 1112,2651 1343,2420 2152.54,2420 2470.54,2738 2527.54,2738 2527.7,2738.16 C71.2@2527.7,2838 ; C71.2@2527,2838 2527.54,2838 2527.7,2838.16 2527.7,2887.84 2527.54,2888 C80.2@2527,2888 ; C80.2@2527.7,2888 v1(2527.7,2980.31)
IREF2: C54.2 C63.2 C72.2 C81.2 C90.2 H17.7 U8.5 | length 3104
  Top Layer w5: U8.5@2577.01,3097.04 2577.01,3160.76 v1(2591.29,3175.04)
  Top Layer w20: H17.7@492,3305.55 494.22,3307.78 607.91,3307.78 v6(610.14,3310)
  Bottom Layer w20: v6@599,3310 v6(610.14,3310) 1460,3310 1601,3451 1601,3695 1727,3821 2433,3821 2485,3769 2485,3623 2581.69,3526.31 2581.69,3425 2581.69,3375 2581.69,3325 2581.69,3275 2581.69,3225 2581.69,3184.64 v1(2591.29,3175.04)
LDO_REF: C50.2 C59.2 C68.2 C77.2 C86.2 H16.7 U8.10 | length 3837.1
  Top Layer w5: U8.10@2631.01,3097.04 2631.01,3110.55 2687.77,3167.31 v1(2688.44,3167.31)
  Top Layer w20: H16.7@492,4095.55 493.72,4097.28 696.88,4097.28 v6(698.6,4099)
  Bottom Layer w5: 2705.76,3184.64 2711.89,3184.64
  Bottom Layer w20: v6(698.6,4099) 2919,4099 2967,4051 2967,3570.06 3045,3492.06 3045,3211.99 3017.81,3184.8 2991,3184.8 2990.84,3184.64 2711.89,3184.64 ; v1(2688.44,3167.31) 2705.76,3184.64
LF_VB: C51.2 C60.2 C69.2 C78.2 C87.2 H16.10 U8.27 | length 421.4
  Top Layer w5: 2451.6,2987.71 2474.2,3010.31 2543.01,3010.31 2551.01,3018.31 U8.27@2551.01,3031.04
  Top Layer w60: H16.10@492,3795.55 788.55,3795.55
LF_VB2: C52.2 C61.2 C70.2 C79.2 C88.2 H16.9 U8.7 | length 385.2
  Top Layer w5: U8.7@2597.01,3097.04 2597.01,3144.7 2653.59,3201.27
  Top Layer w60: H16.9@499,3895.55 756.55,3895.55
NC0: VR1.1
NC1: VR2.1
NC2: VR3.1
NC3: VR4.1
NC4: VR5.1
NC6: VR6.1
NC7: VR7.1
NetC8_1: C8.1 R1.1 U1.5 VR1.3 | length 642.3
  Top Layer w20: U1.5@2718.43,943.53 2721.35,946.46 2721.35,1232.82 VR1.3@2724.28,1235.75 2737.81,1235.75 2754.29,1252.22 R1.1@2974.28,1252.22 2975.27,1253.2 3063.3,1253.2 C8.1@3064.28,1254.19
NetC9_1: C9.1 R2.1 U2.5 VR2.3 | length 642.3
  Top Layer w20: U2.5@1618.14,943.53 1621.07,946.46 1621.07,1232.82 VR2.3@1624,1235.75 1637.53,1235.75 1654,1252.22 R2.1@1874,1252.22 1874.98,1253.2 1963.02,1253.2 C9.1@1964,1254.19
NetC10_1: C10.1 R3.1 U3.5 VR3.3 | length 642.3
  Top Layer w20: C10.1@4260.46,1364 4261.45,1363.02 4261.45,1274.98 R3.1@4262.43,1274 4262.43,1054 4278.9,1037.53 VR3.3@4278.9,1024 4284.76,1018.14 U3.5@4571.12,1018.14
NetC11_1: C11.1 R4.1 U4.5 VR4.3 | length 642.3
  Top Layer w20: C11.1@4260.46,2264 4261.45,2263.02 4261.45,2174.98 R4.1@4262.43,2174 4262.43,1954 4278.9,1937.53 VR4.3@4278.9,1924 4281.83,1921.07 4568.2,1921.07 U4.5@4571.12,1918.14
NetC12_1: C12.1 R5.1 U5.5 VR5.3 | length 642.3
  Top Layer w20: C12.1@4260.46,3164 4262.43,3162.03 4262.43,2854 4278.9,2837.53 VR5.3@4278.9,2824 4281.83,2821.07 4568.19,2821.07 U5.5@4571.12,2818.14
NetC13_1: C13.1 R6.1 U6.5 VR6.3 | length 642.3
  Top Layer w20: C13.1@4260.46,4064 4261.45,4063.02 4261.45,3974.98 R6.1@4262.43,3974 4262.43,3754 4278.9,3737.53 VR6.3@4278.9,3724 4281.83,3721.07 4568.19,3721.07 U6.5@4571.12,3718.14
NetC14_1: C14.1 R7.1 U7.5 VR7.3 | length 642.3
  Top Layer w20: U7.5@541.14,943.53 544.63,947.02 544.63,1233.38 VR7.3@547,1235.75 560.53,1235.75 577.03,1252.25 R7.1@789.28,1252.25 ; R7.1@789.31,1252.22 R7.1@797,1252.22 798.01,1253.23 886.05,1253.23 C14.1@887,1254.19
PLL2_CK_N: J8.3 U8.31 | length 967.4
  Top Layer w5: J8.3@2308.5,3520 2122.45,3520 2093.5,3491.05 2093.5,3285.3 2123.48,3255.31 2331.15,3255.31 2516.43,3070.04 U8.31@2539.01,3070.04
PLL2_CK_P: J7.3 U8.30 | length 984
  Top Layer w5: J7.3@1868.5,3520 2054.55,3520 2083.5,3491.05 2083.5,3281.16 2119.34,3245.31 2327.01,3245.31 2512.29,3060.04 U8.30@2539.01,3060.04
PLL_CK_N: J4.3 U8.21 | length 824.3
  Top Layer w5: J4.3@2598.01,2480 2782.44,2480 2813.01,2510.58 2813.01,2563.94 2813.01,2823.17 2788.94,2847.24 2662.94,2973.24 2652.94,2983.24 2629.01,3007.17 U8.21@2629.01,3031.04
PLL_CK_P: J3.3 U8.20 | length 824.3
  Top Layer w5: U8.20@2639.01,3031.04 2639.01,3011.31 2660.01,2990.31 2803.08,2847.24 2823.01,2827.31 2823.01,2559.8 2823.01,2510.58 2853.59,2480 J3.3@3038.01,2480
REF2_CK_N: J6.3 U8.2 | length 1201.1
  Top Layer w5: U8.2@2539.01,3100.66 2539.01,3110.63 2506.68,3142.96 2506.68,3328.16 2691.52,3513 2870.15,3513 2975.49,3618.34 2975.78,3619.06 2976,3619.28 2976,3762 2946,3792 J6.3@2761,3792
REF2_CK_P: J5.3 U8.3 | length 1202.7
  Top Layer w5: U8.3@2549.01,3099.04 2549.01,3114.77 2516.68,3147.1 2516.68,3324.01 2695.67,3503 2874.29,3503 2985.49,3614.2 2985.78,3614.92 2986,3615.14 2986,3762 3016,3792 J5.3@3201,3792
REF_CK_N: J2.3 U8.22 | length 1252.2
  Top Layer w5: J2.3@1750,2597 1750,2781 1781,2812 1814.59,2812 1858.18,2812 2568.88,2812 2611.01,2854.13 U8.22@2611.01,3031.04
REF_CK_P: J1.3 U8.23 | length 1235.6
  Top Layer w5: J1.3@1750,3037 1750,2853 1781,2822 1818.73,2822 1858.18,2822 2564.73,2822 2601.01,2858.28 U8.23@2601.01,3031.04
SCAN_CLKA: H15.7 U8.17 | length 4592.7
  Top Layer w5: U8.17@2676.01,3055.04 2743.36,3055.04 2767.36,3031.04 v1(2800.86,3031.04)
  Top Layer w10: H15.7@492,2486.47 v6(663,2486.47)
  Bottom Layer w5: v6(663,2486.47) 734,2486.47 793,2427.47 793,2218 916.69,2094.31 3233.3,2094.31 3329,2190.01 3329,2866.36 3136.04,3059.31 2829.13,3059.31 v1(2800.86,3031.04)
SCAN_CLKB: H15.8 U8.16 | length 4539.9
  Top Layer w5: U8.16@2676.01,3065.04 2747.5,3065.04 2757.5,3055.04 v1(2781.02,3055.04)
  Top Layer w10: H15.8@492,2386.47 v6(663,2386.47)
  Bottom Layer w5: v6(663,2386.47) 751,2386.47 783,2354.47 783,2213.86 912.55,2084.31 3237.44,2084.31 3339,2185.87 3339,2870.5 3136.18,3073.31 2799.29,3073.31 v1(2781.02,3055.04)
SCAN_IN: H15.10 U8.14 | length 4454
  Top Layer w5: U8.14@2676.01,3085.04 2739.4,3085.04 v1(2759.73,3105.36) v1@2759.73,3102.39
  Top Layer w10: H15.10@492,2186.47 v6(663,2186.47)
  Bottom Layer w5: v6(663,2186.47) 782.1,2186.47 904.26,2064.31 3245.73,2064.31 3359,2177.58 3359,2878.78 3144.47,3093.31 3132.42,3105.36 v1(2759.73,3105.36)
SCAN_OUT: H15.12 U8.12 | length 4552.2
  Top Layer w5: U8.12@2660.51,3098.04 2660.51,3101.64 2665.31,3106.44 2694.7,3106.44 2698.22,3109.96 2698.22,3117.26 v1(2700.32,3119.37)
  Top Layer w10: H15.12@492,1986.47 v6(663,1986.47)
  Bottom Layer w5: v6(663,1986.47) 833.47,1986.47 891.31,2044.31 3254.01,2044.31 3379,2169.3 3379,2926 3162.69,3142.31 2723.27,3142.31 v1(2700.32,3119.37)
SCAN_SEL: H15.11 U8.13 | length 4481.5
  Top Layer w5: H15.11@492,2086.47 v6(663,2086.47) ; U8.13@2673.01,3096.04 2714.96,3096.04 2725.06,3106.14 v1(2728.04,3106.14)
  Bottom Layer w5: v6(663,2086.47) 867.96,2086.47 900.12,2054.31 3249.87,2054.31 3369,2173.44 3369,2918 3157.69,3129.31 2751.22,3129.31 v1(2728.04,3106.14)
SCAN_UPDATE: H15.9 U8.15 | length 4469.1
  Top Layer w5: U8.15@2676.01,3075.04 2754.25,3075.04 2756.75,3077.54 v1(2759.73,3077.54)
  Top Layer w10: H15.9@492,2286.47 v6(663,2286.47)
  Bottom Layer w5: v6(663,2286.47) 729,2286.47 773,2242.47 773,2209.72 908.4,2074.31 3241.59,2074.31 3349,2181.73 3349,2874.64 3140.33,3083.31 3134.61,3089.03 2771.23,3089.03 v1(2759.73,3077.54)
VCO_IREF: C57.2 C66.2 C75.2 C84.2 C93.2 H17.4 U8.28 | length 3148.8
  Top Layer w5: v1(2432.85,3036.04) 2446.58,3022.31 2534.78,3022.31 2541.01,3028.54 U8.28@2541.01,3031.04
  Top Layer w20: v6(204.88,3005) 205.16,3005.28 321.72,3005.28 H17.4@322,3005.55
  Bottom Layer w20: v6@217,3005 v6(204.88,3005) 141,3005 111,2975 111,2807.72 184.72,2734 2384,2734 2432.54,2782.54 2432.54,2796.84 2432.7,2797 C57.2@2433.69,2797 ; v1(2432.85,3036.04) 2432.85,2797.16 C57.2@2433.01,2797
VCO_IREF2: C58.2 C67.2 C76.2 C85.2 C94.2 H17.10 U8.32 | length 2244.5
  Top Layer w5: v1(2469.54,3167.31) 2469.54,3150.64 2522.85,3097.33 2522.85,3085.97 2525.78,3083.04 U8.32@2539.01,3083.04
  Top Layer w20: H17.10@492,3005.55 493.28,3006.83 610.83,3006.83 v6(612.11,3008.11)
  Bottom Layer w20: v6@611,3007 1231,3007 1446,3222 1913,3222 1994.03,3140.97 2005.44,3129.56 2432.58,3129.56 2432.58,3131.21 2468.68,3167.31 v1(2469.54,3167.31)
VDD12_0: H15.4 H15.5 H15.6 | length 200
  Top Layer w40: H15.6@322,1986.47 H15.5@322,2086.47 H15.4@322,2186.47
VDD33: C1.2 C2.2 C3.2 C4.2 C5.2 C6.2 C7.2 H1.3 H2.3 H3.3 H4.3 H5.3 H6.3 H7.3 P1.1 U1.2 U2.2 U3.2 U4.2 U5.2 U6.2 U7.2 | length 10519.8
  Top Layer w10: H2.3@5304,1964.33 5344.47,1964.33 5388,2007.86 5388,2261.21 C4.2@5389.79,2263 ; H4.3@5344.47,1064.33 5388,1107.86 5388,1361.21 C3.2@5389.79,1363 ; H5.3@5344.47,2864.33 5388,2907.86 5388,3161.21 C5.2@5389.79,3163 ; H6.3@5344.47,3775.33 5388,3818.86 5388,4072.21 C6.2@5389.79,4074
  Top Layer w40: v5(1040.31,220.75) 1040.87,221.31 1040.87,355.19 v5(1040.31,355.75) 1040.87,356.31 1040.87,495.19 v5(1040.31,495.75) 1040.87,496.31 1040.87,645.19 v5(1040.31,645.75) ; v5@1040.28,645.78 914.88,645.78 742.49,818.17 742.49,942.97 U7.2@741.93,943.53 743.23,944.83 743.23,1000.07 743.79,1000.63 743.79,1035.71 825.86,1117.78 1098.14,1117.78 1098.61,1117.31 H7.3@1107.67,1117.31 ; v5@1040.34,645.78 1212.91,645.78 C7.2@1213.44,646.31 ; v5(2117.31,220.75) v5(2117.31,355.75) v5(2117.31,495.75) v5(2117.31,645.75) ; H3.3@2183,1117.31 2182.56,1117.75 1902.3,1117.75 1820.23,1035.68 1820.23,944.83 U2.2@1818.93,943.53 1818.93,818.14 1991.33,645.75 v5(2117.31,645.75) ; C2.2@2290.44,646.31 2289.88,645.75 v5(2117.31,645.75) ; v5(3217.6,220.75) v5(3217.6,355.75) v5(3217.6,495.75) v5(3217.6,645.75) ; H1.3@3283.28,1117.31 3282.84,1117.75 3002.58,1117.75 2920.51,1035.68 2920.51,944.83 U1.2@2919.21,943.53 2919.21,818.14 3091.61,645.75 v5(3217.6,645.75) ; C1.2@3390.72,646.31 3390.17,645.75 v5(3217.6,645.75) ; U5.2@4569.82,3020.23 U5.2@4571.12,3018.93 4696.51,3018.93 4868.9,3191.33 v5(4868.9,3317.31) v5(5018.9,3317.31) v5(5158.9,3317.31) v5(5293.9,3317.31) 5391,3220.22 C5.2@5391,3164.21 ; U4.2@4569.83,2120.23 U4.2@4571.12,2118.93 4696.51,2118.93 4868.9,2291.33 v5(4868.9,2417.31) v5(5018.9,2417.31) v5(5158.9,2417.31) v5(5293.9,2417.31) 5391,2320.22 C4.2@5391,2264.21 ; U3.2@4571.12,1218.93 4696.51,1218.93 4868.9,1391.33 v5(4868.9,1517.31) v5(5018.9,1517.31) v5(5158.9,1517.31) v5(5293.9,1517.31) 5391,1420.22 C3.2@5391,1364.21 ; U6.2@4571.12,3918.93 4696.51,3918.93 ; 4696.51,3929.93 4868.9,4102.33 v5(4868.9,4228.31) v5(5018.9,4228.31) v5(5158.9,4228.31) v5(5293.9,4228.31) 5391,4131.22 C6.2@5391,4075.21
  other v3: 4784,208 4834,208 4884,208 4934,208 4984,208 5034,208 5084,208 5134,208 5184,208 4784,258 4834,258 4884,258 4934,258 4984,258 5034,258 5084,258 5134,258 5184,258 4784,308 4834,308 4884,308 4934,308 4984,308 5034,308 5084,308 5134,308 5184,308 4784,358 4834,358 4884,358 4934,358 4984,358 5034,358 5084,358 5134,358 5184,358 4784,408 4834,408 4884,408 4934,408 4984,408 5034,408 5084,408 5134,408 5184,408 4784,458 4834,458 4884,458 4934,458 4984,458 5034,458 5084,458 5134,458 5184,458 4784,508 4834,508 4884,508 4934,508 4984,508 5034,508 5084,508 5134,508 5184,508 4784,558 4834,558 4884,558 4934,558 4984,558 5034,558 5084,558 5134,558 5184,558 4784,608 4834,608 4884,608 4934,608 4984,608 5034,608 5084,608 5134,608 5184,608
VDD_BUF: C17.2 C24.2 C31.2 C38.2 C45.2 H10.2 H10.4 U8.19
VDD_BUF2: C21.2 C28.2 C35.2 C42.2 C49.2 H14.2 H14.4 U8.29 | length 24.7
  Top Layer w5: 2514.29,3046.04 U8.29@2539.01,3046.04
  other v3: 2162,3186 2202,3186 2242,3186 2282,3186
  other v4: 799,1865 939,1865 1079,1865 797,1935 937,1935 1077,1935
VDD_BUF2_M: C14.2 H14.1 H14.3 R7.2 U7.4
VDD_BUF_M: C10.2 H10.1 H10.3 R3.2 U3.4
VDD_LDO: C18.2 C25.2 C32.2 C39.2 C46.2 H11.2 H11.4 U8.11
VDD_LDO_M: C11.2 H11.1 H11.3 R4.2 U4.4
VDD_PD: C16.2 C23.2 C30.2 C37.2 C44.2 H9.2 H9.4 U8.24
  other v3: 2054,2935 2094,2935 2134,2935 2174,2935 2214,2935 2254,2935
  other v4: 2144,1747 2214,1747 2284,1747 2144,1817 2214,1817 2284,1817 1864,1887 1934,1887 2004,1887 2074,1887 2144,1887 2214,1887 2284,1887 1864,1957 1934,1957 2004,1957 2074,1957 2144,1957 2214,1957 2284,1957 1869,2197 1939,2197 2009,2197 2079,2197 2149,2197 2219,2197 2289,2197 1869,2267 1939,2267 2009,2267 2079,2267 2149,2267 2219,2267 2289,2267
VDD_PD2: C20.2 C27.2 C34.2 C41.2 C48.2 H13.2 H13.4 U8.4
  other v3: 3097,3373 3137,3373 3177,3373 3217,3373 3257,3373 3097,3413 3137,3413 3177,3413 3217,3413 3257,3413
  other v4: 3582,3610 3652,3610 3722,3610 3792,3610 3582,3750 3652,3750 3722,3750 3792,3750 3582,3890 3652,3890 3722,3890 3792,3890 3582,4030 3652,4030
VDD_PD2_M: C13.2 H13.1 H13.3 R6.2 U6.4
VDD_PD_M: C9.2 H9.1 H9.3 R2.2 U2.4
VDD_VCO: C19.2 C26.2 C33.2 C40.2 C47.2 H12.2 H12.4 U8.9 | length 7.7
  Top Layer w40: H12.4@3791.88,3209.53 H12.4@3797.34,3215
VDD_VCO_M: C12.2 H12.1 H12.3 R5.2 U5.4
pads on no net: H16.1 H16.2 H16.3 H16.4 H16.6 H16.8 H16.12 H17.3 H17.6 H17.9 H17.12

## Polygon pours and split planes (outlines as drawn)
VDD_PD on Top Layer "VDD_PD_L01_P005" (solid, pour order 5): 2578.59,3031.04 2588.51,3031.04 2588.51,2944.3 2551.01,2906.31 2022,2906.31 2022,2963.31 2555.88,2963.31 2578.59,2986.03
GND on Top Layer "GND_L01_P058" (solid, remove dead copper, pour order 58): 0,4441 0,0 5844,0 5844,4441
VDD_BUF on Top Layer "Top Layer-VDD_BUF" (solid, pour order 49): 3082,2870 3277,2870 3277,3005.31 2733.02,3005.31 2702.29,3036.04 2670.41,3036.04 2670.41,3026.04 2746.45,2950 3082,2950
DVDD on Top Layer "DVDD_L01_P043" (solid, pour order 43): 2369,1982 3160,1982 3160,1632 2369,1632
VDD_BUF_M on Top Layer "Top Layer-No Net" (solid, pour order 40): 4697.36,1073.69 4697.36,1122 4442.36,1122 4442.36,1481 3897.35,1481 3897.34,1036.69 4180.9,1036.69 4180.9,922.69 4697.36,922.69
VDD_PD_M on Top Layer "Top Layer-No Net" (solid, remove dead copper, pour order 39): 1673.69,817.29 1722,817.29 1722,1072.29 2081,1072.29 2081,1617.31 1636.69,1617.31 1636.69,1333.75 1522.69,1333.75 1522.69,817.29
VDD_LDO_M on Top Layer "Top Layer-No Net" (solid, pour order 37): 4697.36,1973.69 4697.36,2022 4442.36,2022 4442.36,2381 3897.35,2381 3897.34,1936.69 4180.9,1936.69 4180.9,1822.69 4697.36,1822.69
VDD_VCO_M on Top Layer "Top Layer-No Net" (solid, pour order 36): 4697.36,2873.69 4697.36,2922 4442.36,2922 4442.36,3281 3897.34,3281 3897.34,2836.69 4180.9,2836.69 4180.9,2722.69 4697.36,2722.69
VDD_PD2_M on Top Layer "Top Layer-No Net" (solid, pour order 35): 4697.36,3773.69 4697.36,3822 4442.36,3822 4442.36,4181 3897.34,4181 3897.34,3736.69 4180.9,3736.69 4180.9,3622.69 4697.36,3622.69
VDD_BUF2_M on Top Layer "Top Layer-No Net" (solid, remove dead copper, pour order 34): 596.69,817.29 645,817.29 645,1072.29 1004,1072.29 1004,1617.31 559.69,1617.31 559.69,1333.75 445.69,1333.75 445.69,817.29
DVDD_M on Top Layer "Top Layer-No Net" (solid, remove dead copper, pour order 8): 2773.97,817.29 2822.28,817.29 2822.28,1072.29 3181.28,1072.29 3181.28,1617.31 2736.97,1617.31 2736.97,1333.75 2622.97,1333.75 2622.97,817.29
LF_VB2 on Top Layer "Top Layer-LF_VB2 1" (solid, pour order 57): 3358,3255.08 3505,3255.08 3505,4200 1125,4200 1125,3996 611,3996 611,3866 1125,3866 1583,3866 1583,4094 3413,4094 3413,3302.51 3358,3302.51
LF_VB on Top Layer "Top Layer-LF_VB" (solid, pour order 52): 607,3685 1451,3685 1451,3215 1941,3215 1997,3159 1997,2964 2084,2964 2084,3162.17 1965.17,3281 1587,3281 1587,3825 607,3825
LF_VB on Top Layer "LF_VB_L01_P010" (solid, remove dead copper, pour order 10): 2023,3012.81 2482.3,3012.81 2482.3,3003.23 2443.07,2964 2023,2964
LF_VB2 on Top Layer "Top Layer-LF_VB2" (solid, pour order 26): 2711.03,3255.31 3379,3255.31 3379,3302.53 2731.36,3302.53 2632.51,3203.68 2632.51,3184.2 2639.92,3184.2 2649.27,3193.55
VDD_BUF2 on Top Layer "Top Layer-VDD_BUF2" (solid, remove dead copper, pour order 17): 2136.22,3111.42 2356.47,3111.43 2436.01,3031.88 2482.3,3031.88 2522.36,3031.88 2534.01,3043.54 2534.01,3048.54 2465.64,3048.54 2308.18,3206 2136.22,3206
VDD_BUF2 on Top Layer "VDD_BUF2_L01_P041" (solid, pour order 41): 731,1981 1141,1981 1141,1631 731,1631
VDD_PD on Top Layer "VDD_PD_L01_P042" (solid, pour order 42): 1782,2301 2369,2301 2369,1632 1782,1632
VDD_BUF on Top Layer "VDD_BUF_L01_P044" (solid, pour order 44): 3254,1509 3871,1509 3871,1221 3254,1221
VDD_LDO on Top Layer "VDD_LDO_L01_P045" (solid, pour order 45): 3431,2416 3877,2416 3877,2101 3431,2101
VDD_VCO on Top Layer "VDD_VCO_L01_P046" (solid, pour order 46): 3540,3245 3881,3245 3881,2965 3540,2965
VDD_PD2 on Top Layer "VDD_PD2_L01_P047" (solid, pour order 47): 3544,4178 3885,4178 3885,3550 3544,3550
VDD_LDO on Top Layer "VDD_LDO_L01_P053" (solid, pour order 53): 3431,2406 3431,3153 3537,3153 3537,2406
VDD_BUF on Top Layer "VDD_BUF_L01_P054" (solid, pour order 54): 3246.8,1221 3246.8,3004.98 3352.8,3004.98 3352.8,1221
VDD_PD2 on Top Layer "Top Layer-VDD_PD2" (solid, pour order 61): 2561.01,3147.05 2561.01,3097.04 2569.01,3097.04 2568.75,3147.05 2772.74,3351.04 3283,3351.04 3283,3433.31 2779.15,3433.31 2716.72,3370.88 2561.01,3215.31 2546.68,3201.39 2546.69,3159.55 2559.18,3147.05 2561.01,3145.23
VDD_LDO on Top Layer "Top Layer-No Net 1" (solid, pour order 19): 2640.01,3097.04 2652.01,3097.04 2652.01,3106.87 2658.83,3113.69 3537,3113.69 3537,3159.31 2688.63,3159.31 2640.01,3110.69
VDD_VCO on Top Layer "Top Layer-VDD_VCO" (solid, remove dead copper, pour order 24): 2675.49,3164.91 3544,3164.91 3544,3209.8 2692.12,3209.8 2615.01,3132.69 2615.01,3097.04 2623.01,3097.04 2623.01,3112.27
GND on Bottom Layer "GND_L04_P059" (solid, pour order 59): 0,4441 0,0 5844,0 5844,4441
VDD33 on Power Layer (split plane): 5823.9,20.1 20.1,20.1 20.1,4420.9 5823.9,4420.9
VDD_BUF2 on Power Layer (split plane): 2303.4,3107.1 1140,3107.1 1138.05,3106.71 1136.39,3105.6 1135.29,3103.95 1134.9,3102 1134.9,1640.1 737.1,1640.1 737.1,3208.9 2303.4,3208.9
VDD_PD on Power Layer (split plane): 2363.9,1637.1 1786.1,1637.1 1786.1,2957.9 2363.9,2957.9
DVDD on Power Layer (split plane): 2639.9,2911.1 2506,2911.1 2504.05,2910.71 2502.4,2909.6 2501.29,2907.95 2500.9,2906 2500.9,1983 2501.29,1981.05 2502.4,1979.4 2504.05,1978.29 2506,1977.9 3154.9,1977.9 3154.9,1637.1 2374.1,1637.1 2374.1,2964 2374.1,3004.9 2506,3004.9 2507.95,3005.29 2509.6,3006.4 2510.71,3008.05 2511.1,3010 2511.1,3223.9 2639.9,3223.9
VDD_PD2 on Power Layer (split plane): 3878.9,3355.1 3074.1,3355.1 3074.1,3516.9 3543,3516.9 3544.95,3517.29 3546.6,3518.4 3547.71,3520.05 3548.1,3522 3548.1,4171.9 3878.9,4171.9
GND on GND Layer (split plane): 5823.9,20.1 20.1,20.1 20.1,4420.9 5823.9,4420.9

## Keep-outs
Top Layer:
  region: 5546,193 ccw(c5656,193) 5656,83 ccw(c5656,193) 5766,193 ccw(c5656,193) 5656,303 ccw(c5656,193)
  region: 5546,4269 ccw(c5656,4269) 5656,4159 ccw(c5656,4269) 5766,4269 ccw(c5656,4269) 5656,4379 ccw(c5656,4269)
  region: 61,193 ccw(c171,193) 171,83 ccw(c171,193) 281,193 ccw(c171,193) 171,303 ccw(c171,193)
  region: 61,4269 ccw(c171,4269) 171,4159 ccw(c171,4269) 281,4269 ccw(c171,4269) 171,4379 ccw(c171,4269)

## Other copper
Top Layer:
  rectangle net VDD_BUF: 2658.32,3026.04 2698.46,3036.04
  pour cut-out: 2621.01,2973.88 2621.01,2838.19 2621.03,2824.22 2643.01,2824.22 2643.01,2951.96 2641.51,2953.46
  pour cut-out: 2588.51,2944.3 2543.18,2899.03 2543.18,2865.9 2529.08,2851.81 2552.33,2851.81 2588.83,2888.49
  pour cut-out: 2589.01,3041.12 2589.01,2888.49 2552.33,2851.81 1857.92,2851.81 1830,2879.73 1830,3093 1669,3093 1669,2537 1830,2537 1830,2754 1858,2782 2580.83,2782 2623.02,2824.19 2623.02,3040.93
  pour cut-out: 2546.69,3159.55 2557.01,3149.23 2557.01,3090.93 2540.27,3090.93 2540.27,3159.31
  pour cut-out: 2546.68,3091 2546.68,3311.78 2708.9,3474 2887,3474 3016,3603 3016,3675 3058,3717 3262,3717 3262,3872.57 2692,3872.57 2692,3717 2900.35,3717 2945.84,3671.51 2945.84,3630.84 2858,3543 2679.24,3543 2476.69,3340.45 2476.69,3091
  pour cut-out: 2548,3048 2482.05,3048 2314.87,3215.18 2106.63,3215.18 2053.62,3268.19 2053.62,3395.38 2009,3440 1796,3440 1796,3601 2373,3601 2373,3440 2167,3440 2123.48,3396.48 2123.48,3297.73 2136.22,3285 2343.54,3285 2532.54,3096 2548,3096
  pour cut-out: 2621.07,3041 2621.01,2973.88 2783,2811.89 2783,2624.99 2718.01,2560 2530,2560 2530,2396.85 3097,2397.15 3097,2560 2918.01,2560 2853,2625.01 2853,2838.62 2650.62,3041
  region net VDD_BUF: 2688.14,3008.31 2670.41,3026.04 2661.14,3026.04 2661.14,3036.04 2689.18,3036.04 2701.75,3036.04 2712.38,3025.4
Power Layer (plane layer: these items are gaps in the copper):
  lines w10: 2122,1632 3160,1632 3160,1983 2506,1983 2506,2906 2645,2906 2645,3229 2506,3229 2506,3010 2369,3010 2369,2963 1781,2963 1781,1632 2021,1632 2369,1632 2369,2964 ; 3869,1508 3873,1504 3873,1221 ; 732,1635 1140,1635 1140,3102 2308.5,3102 2308.5,3214 1564,3214 732,3214 732,1635 ; 3069,3350 3745,3350 3884,3350 3884,4177 3543,4177 3543,3522 3069,3522 3069,3350

## Silkscreen, mask and mechanical layers (free items; w line width, h text height)
Top Overlay:
  drawing of 629 lines, arcs and shapes, not listed
  text "PLL Board V1" at 991.5,3925.5 h30
  text "Apr 2021" at 1041.25,3858.25 h30